# Altium PCB xinbanzi.PcbDoc
Units mil, origin at the board's own origin, x right, y up, seen from the top; angles counter-clockwise.
Board outline 267.72 x 984.25 mil, 2 copper layers (Top Layer, Bottom Layer); 4 components, 0 nets, 32 pads, 0 vias.
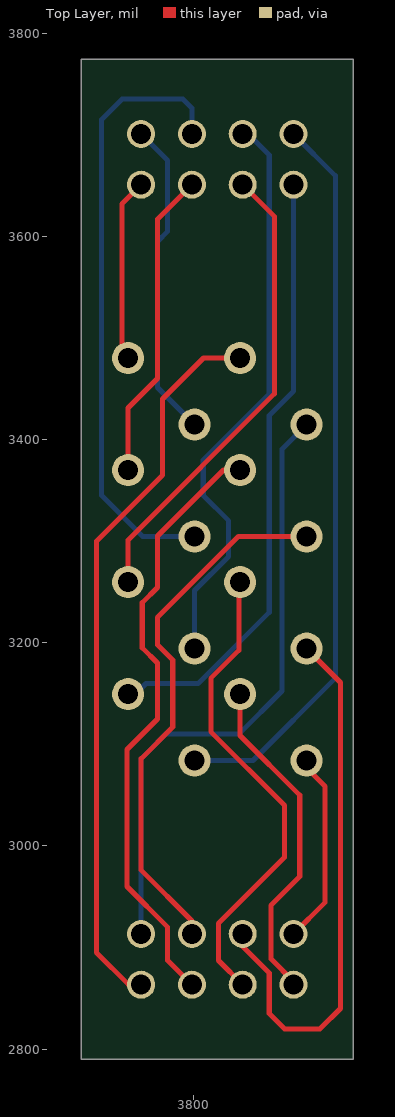
[diagram p0: Top Layer view]
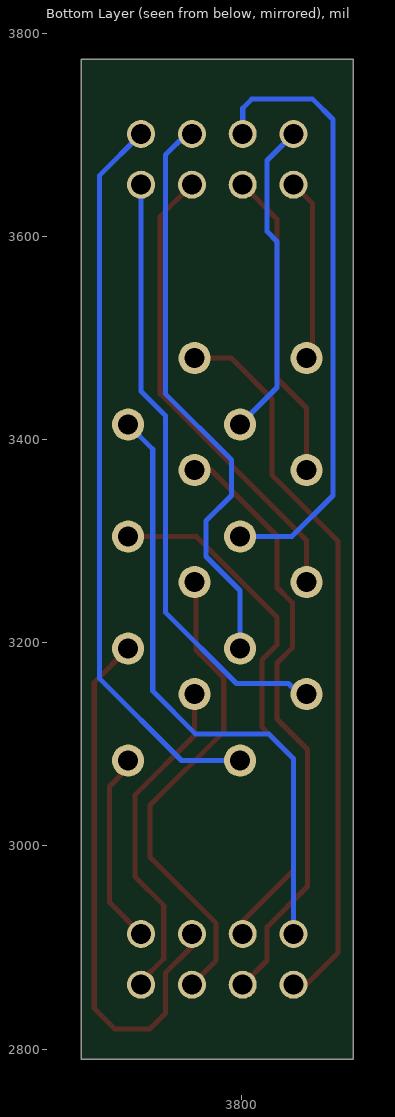
[diagram p1: Bottom Layer view, seen from below]

## Layer stack, top to bottom
Top Solder: solder mask 0.4, Solder Resist, Dk 3.5
Top Layer: signal copper 1.4
Dielectric 1: dielectric 12.6, FR-4, Dk 4.8
Bottom Layer: signal copper 1.4
Bottom Solder: solder mask 0.4, Solder Resist, Dk 3.5

## Board outline
3690,2790 3957.72,2790 3957.72,3774.25 3690,3774.25

## Design rules (kind name [scope] priority, off if disabled: settings)
Clearance [All] p1: gap=6 ignorepadtopadclearanceinfootprint=FALSE
PolygonConnect [All] p1: connectstyle=Relief reliefconductorwidth=10 reliefentries=4 polygonreliefangle="90 Angle" airgapwidth=10
RoutingVias [All] p1: holewidth=28 width=50 viastyle="Through Hole" minholewidth=28 minwidth=50 maxholewidth=28 maxwidth=50
SolderMaskExpansion [All] p1: expansion=4
Width [All] p1: maxlimit=5 minlimit=5 preferedwidth=5
30 further rules are at their usual default settings.

## Components (designator, comment, footprint, x,y, rotation, side; value= is the part's Value field where it differs from the comment)
J1 "row A" "row A" 3736.02,3480.2 r0 top
J2 "row B" "row B" 3748.86,3650.83 r0 top
J3 "row B" "row B" 3748.86,2863.43 r0 top
J4 "row A" "row A" 3801.46,3414.76 r0 top

## Footprints (in the part's own frame and the unit in brackets; to place one, negate y for a bottom-side part, rotate by r counter-clockwise, add the part's x,y. Pads: shape width x height; smd on the part's side, far side on the other; paste and mask are expansions set on the pad)
"row A" [mm]
  round 0.8 hole 0.5: 1(0,0) 2(0,-2.8) 3(0,-5.6) 4(0,-8.4) 5(2.8,0) 6(2.8,-2.8) 7(2.8,-5.6) 8(2.8,-8.4)
"row B" [mm]
  round 0.7 hole 0.5 mask+0.102: 1(0,0) 2(1.27,0) 3(2.54,0) 4(3.81,0) 5(0,1.27) 6(1.27,1.27) 7(2.54,1.27) 8(3.81,1.27)

## Nets (pads, with @x,y where several pads share a name; then routed paths per layer and width w, separated by ;. In a path a pad name is that pad's centre, name@x,y a point inside that pad or via, vN(x,y) a via of type N, cw(c..) or ccw(c..) an arc to the next point about the centre after c; other vN are vias at no path point)
pads on no net: J1.1 J1.2 J1.3 J1.4 J1.5 J1.6 J1.7 J1.8 J2.1 J2.2 J2.3 J2.4 J2.5 J2.6 J2.7 J2.8 J3.1 J3.2 J3.3 J3.4 J3.5 J3.6 J3.7 J3.8 J4.1 J4.2 J4.3 J4.4 J4.5 J4.6 J4.7 J4.8
copper on no net: | length 7777.8
  Top Layer w5: 3736.02,3259.72 3736.02,3301.02 3880,3445 3880,3619.69 3848.86,3650.83 ; 3736.02,3369.96 3736.02,3431.02 3765,3460 3765,3616.97 3798.86,3650.83 ; 3736.02,3480.2 3730,3486.22 3730,3631.97 3748.86,3650.83 ; 3748.86,2863.43 3736.57,2863.43 3705,2895 3705,3300 3770,3365 3770,3440 3810.2,3480.2 3846.26,3480.2 ; 3798.86,2863.43 3775,2887.28 3775,2920 3735,2960 3735,3095 3765,3125 3765,3180 3750,3195 3750,3239.41 3765,3254.41 3765,3305 3829.96,3369.96 3846.26,3369.96 ; 3798.86,2913.43 3798.86,2926.14 3748.86,2976.14 3748.86,3085.93 3780,3117.07 3780,3182.93 3765,3197.93 3765,3225 3844.53,3304.53 3911.69,3304.53 ; 3846.26,3149.49 3846.26,3108.74 3905,3050 3905,2970 3876.58,2941.58 3876.58,2888.98 3898.86,2866.7 3898.86,2863.43 ; 3846.26,3259.72 3845,3258.46 3845,3192.5 3817.5,3165 3817.5,3112.5 3890,3040 3890,2988.86 3825,2923.86 3825,2887.28 3848.86,2863.43 ; 3848.86,2913.43 3848.86,2901.14 3875,2875 3875,2835 3890,2820 3925,2820 3945,2840 3945,3160.98 3911.69,3194.29 ; 3898.86,2913.43 3930,2944.57 3930,3058.58 3911.69,3076.89 3911.69,3084.06
  Bottom Layer w5: 3736.02,3149.49 3743.19,3149.49 3753.71,3160 3805,3160 3875,3230 3875,3423.79 3898.86,3447.65 3898.86,3650.83 ; 3748.86,2913.43 3748.86,3085.93 3772.93,3110 3845,3110 3887.44,3152.44 3887.44,3390.52 3911.69,3414.76 ; 3748.86,3700.83 3775,3674.69 3775,3605 3765,3595 3765,3451.22 3801.46,3414.76 ; 3797.49,2864.8 3798.86,2863.43 ; 3798.86,3700.83 3798.86,3726.14 3790,3735 3730,3735 3710,3715 3710,3345 3750.47,3304.53 3801.46,3304.53 ; 3801.46,3084.06 3859.06,3084.06 3940,3165 3940,3659.69 3898.86,3700.83 ; 3801.46,3194.29 3801.46,3251.46 3835,3285 3835,3320 3810,3345 3810,3380 3875,3445 3875,3680 3854.17,3700.83 3848.86,3700.83

## Silkscreen, mask and mechanical layers (free items; w line width, h text height)
Mechanical 1:
  circle w5: c3823.86,3528.19 r17.72
  circle w5: c3823.86,3036.06 r17.72
  lines w5: 3690,2790 3690,3774.25 3957.72,3774.25 3957.72,2790 3690,2790 ; 3784.49,2986.85 3863.23,2986.85 3863.23,3006.54 3784.49,3006.54 3784.49,2986.85 ; 3784.49,3557.72 3784.49,3577.4 3863.23,3577.4 3863.23,3557.72 3784.49,3557.72